# EAGLE board module_RF69 (EAGLE 8.7.0)
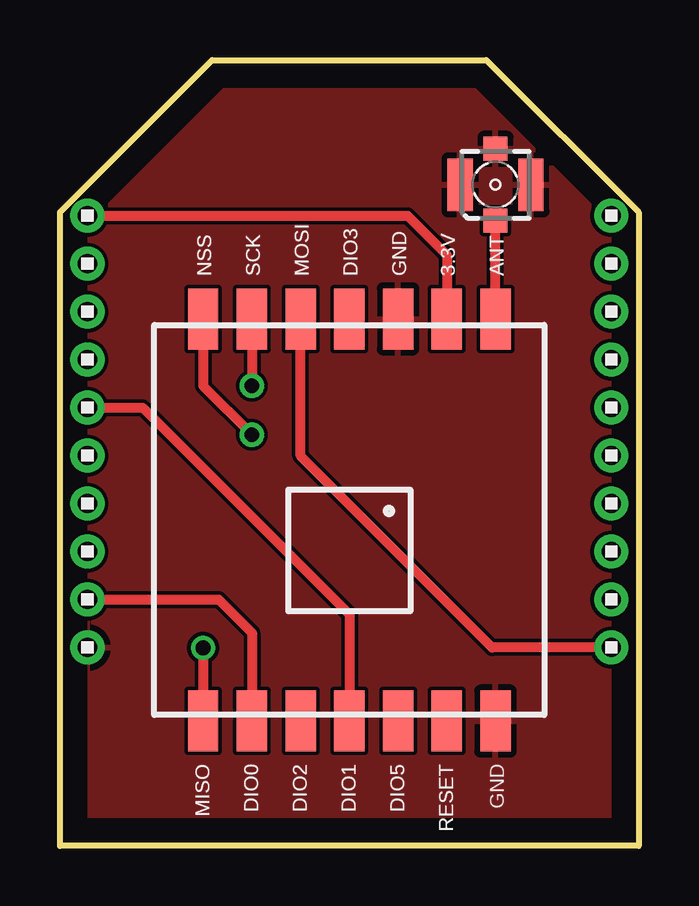
[diagram p0: board, top side]
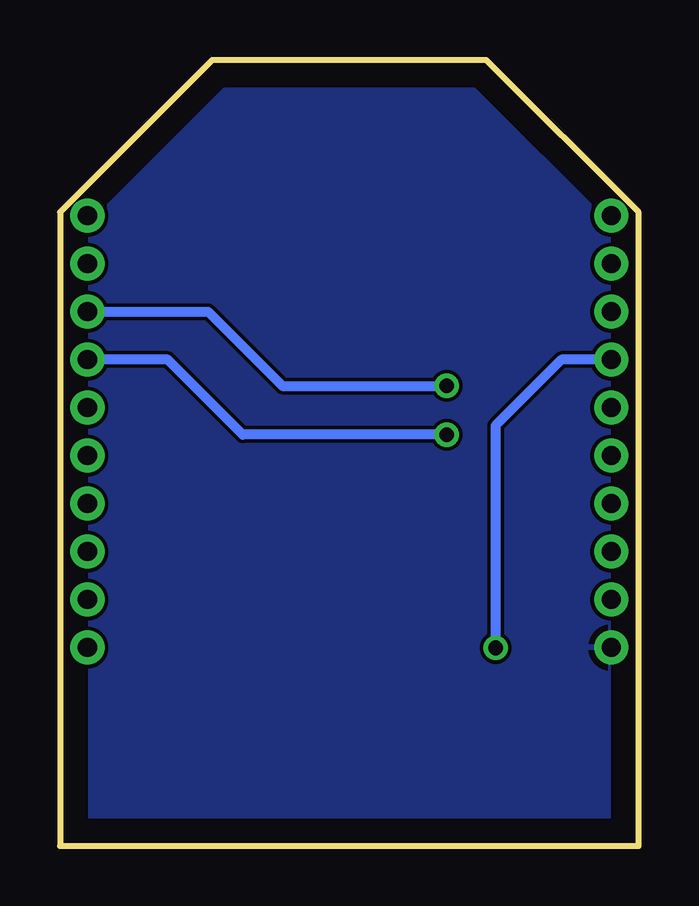
[diagram p1: board, bottom side, seen from below]

Size 24.13 x 32.77 mm. Coordinates in mm from the lower left corner, seen from the top.
Outline: 0,0 0,26.42 6.35,32.77 17.78,32.77 24.13,26.42 24.13,0 0,0
Copper layers (1*16): Top 0.035mm / dielectric 1.5mm / Bottom 0.035mm
Design rules "default": minimum track width 6mil, minimum drill 0.35mm, track to track 6mil, track to pad 6mil, pad to pad 6mil, via to via 6mil, smd to smd 6mil, copper to edge 40mil, drill to drill 6mil, minimum pad ring 10mil, minimum via ring 8mil, stop-mask expansion 4mil, vias tented up to drill 0mil, thermal gap 10mil

## Footprints (pad centres in the part's own frame; a part is rotated, then mirrored left to right if it is on the bottom)
SMD1,27-2,54 = smd 1.27 x 2.54: 1 0,0
1X10 = drill 0.8 pad 1.422: 1 -9,0; 2 -7,0; 3 -5,0; 4 -3,0; 5 -1,0; 6 1,0; 7 3,0; 8 5,0; 9 7,0; 10 9,0
734120110 = smd 1 x 1: 1 0,-1.5; S@1 0,1.5 | smd 1.05 x 2.2: S@2 -1.475,0; S@3 1.475,0

## Placement (x,y rotation side)
3.3V  [SMD1,27-2,54]  16.13,21.97 0 top
ANT  [SMD1,27-2,54]  18.16,21.97 0 top
DIO0  [SMD1,27-2,54]  8,5.21 0 top
DIO1  [SMD1,27-2,54]  12.06,5.21 0 top
DIO2  [SMD1,27-2,54]  10.03,5.21 0 top
DIO3  [SMD1,27-2,54]  12.06,21.97 0 top
DIO5  [SMD1,27-2,54]  14.1,5.21 0 top
GND  [SMD1,27-2,54]  14.1,21.97 0 top
GND_ANT  [SMD1,27-2,54]  18.16,5.21 0 top
LEFT1  1X10  [1X10]  1.14,17.27 270 top
MISO  [SMD1,27-2,54]  5.97,5.21 0 top
MOSI  [SMD1,27-2,54]  10.03,21.97 0 top
NSS  [SMD1,27-2,54]  5.97,21.97 0 top
RESET  [SMD1,27-2,54]  16.13,5.21 0 top
RIGHT1  1X10  [1X10]  22.99,17.27 270 top
SCK  [SMD1,27-2,54]  8,21.97 0 top
X1  734120110  [734120110]  18.16,27.56 0 top

## Library data of the parts
3.3V ANT DIO0 DIO1-DIO3 DIO5 GND GND_ANT MISO MOSI NSS RESET SCK = wirepad
LEFT1 RIGHT1 = headers(2mm)
X1 = con-coax

## Nets
ANT: ANT.1 X1.1
GND: GND.1 GND_ANT.1 LEFT1.10 X1.S@1 X1.S@2 X1.S@3
INT0: DIO0.1 LEFT1.9
INT1: DIO1.1 LEFT1.5
SPI_CS: NSS.1 RIGHT1.4
SPI_MISO: LEFT1.4 MISO.1
SPI_MOSI: MOSI.1 RIGHT1.10
SPI_SCK: RIGHT1.3 SCK.1
VCC: 3.3V.1 LEFT1.1

## Tracks (layer width: path | path; a pad name or v marks a point on that pad's centre or on a via)
ANT
  Top 0.406: ANT.1 X1.1
GND
  pour Bottom: -0.51,-0.51 -0.51,26.67 6.1,33.27 18.03,33.27 24.64,26.67 24.64,-0.51
  pour Top: -0.25,-0.25 -0.25,26.54 6.22,33.02 17.91,33.02 24.38,26.54 24.38,-0.25
INT0
  Top 0.406: DIO0.1 8,8.89 6.62,10.27 LEFT1.9
INT1
  Top 0.406: DIO1.1 12.06,9.65 3.45,18.27 LEFT1.5
SPI_CS  (via drill 0.61)
  Top 0.406: NSS.1 5.97,19.18 v8,17.14
  Bottom 0.406: RIGHT1.4 19.64,20.27 16.51,17.14 v8,17.14
SPI_MISO  (via drill 0.61)
  Top 0.406: v5.97,8.25 MISO.1
  Bottom 0.406: LEFT1.4 3.22,20.27 5.97,17.53 v5.97,8.25
SPI_MOSI
  Top 0.406: MOSI.1 10.03,16.26 18.02,8.27 RIGHT1.10
SPI_SCK  (via drill 0.61)
  Top 0.406: SCK.1 v8,19.18
  Bottom 0.406: v8,19.18 14.86,19.18 17.95,22.27 RIGHT1.3
VCC
  Top 0.406: LEFT1.1 14.49,26.27 16.13,24.64 3.3V.1

## Text on the board
_tNames: NSS | SCK | MOSI | DIO3 | GND | 3.3V | ANT | MISO | DIO0 | DIO2 | DIO1 | DIO5 | RESET | GND
HeatSink: PWR: / LOG: | 3.3 V / 3.3 V | RF69